# Altium PCB EE-1002657_FAB_IMUPlusMAGIslands.PcbDoc
Units mm, origin at the board's own origin, x right, y up, seen from the top; angles counter-clockwise.
Board outline 10.48 x 11.8 mm, 4 copper layers (L01-Top Layer, L02-Inner Layer, L03-Inner Layer, L04-Bottom Layer), stack 1.488 mm thick; 31 components, 21 nets, 114 pads, 57 vias.
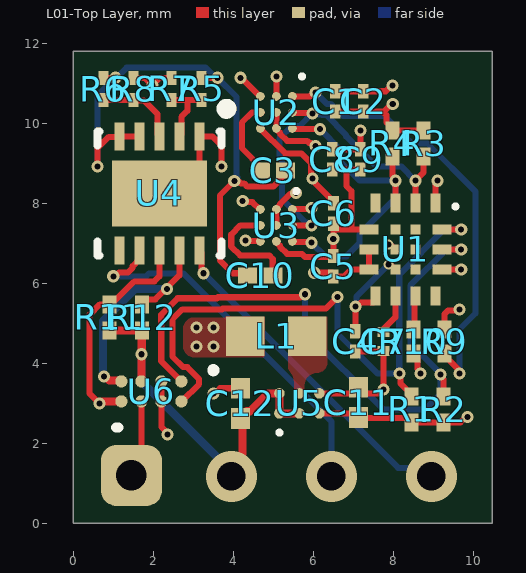
[diagram p0: L01-Top Layer view]
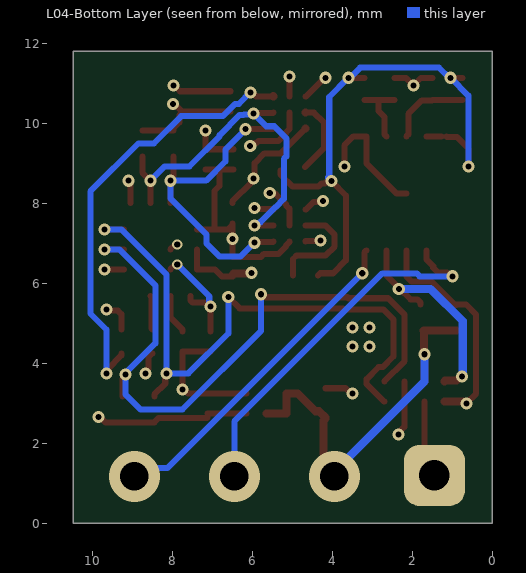
[diagram p1: L04-Bottom Layer view, seen from below]
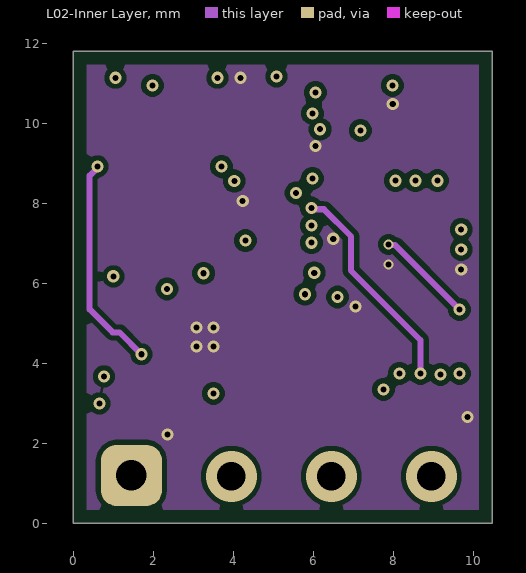
[diagram p2: L02-Inner Layer]
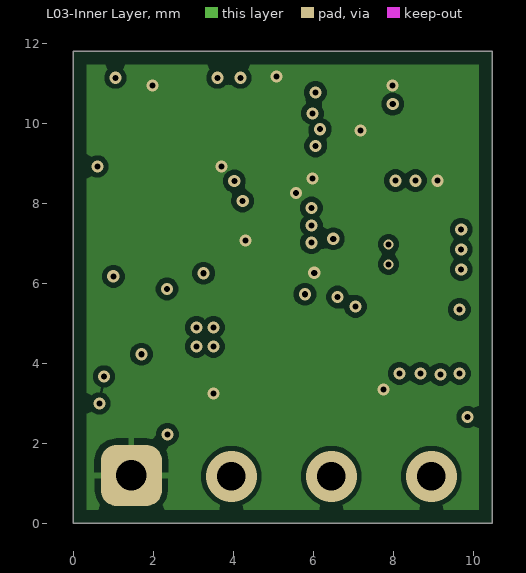
[diagram p3: L03-Inner Layer]
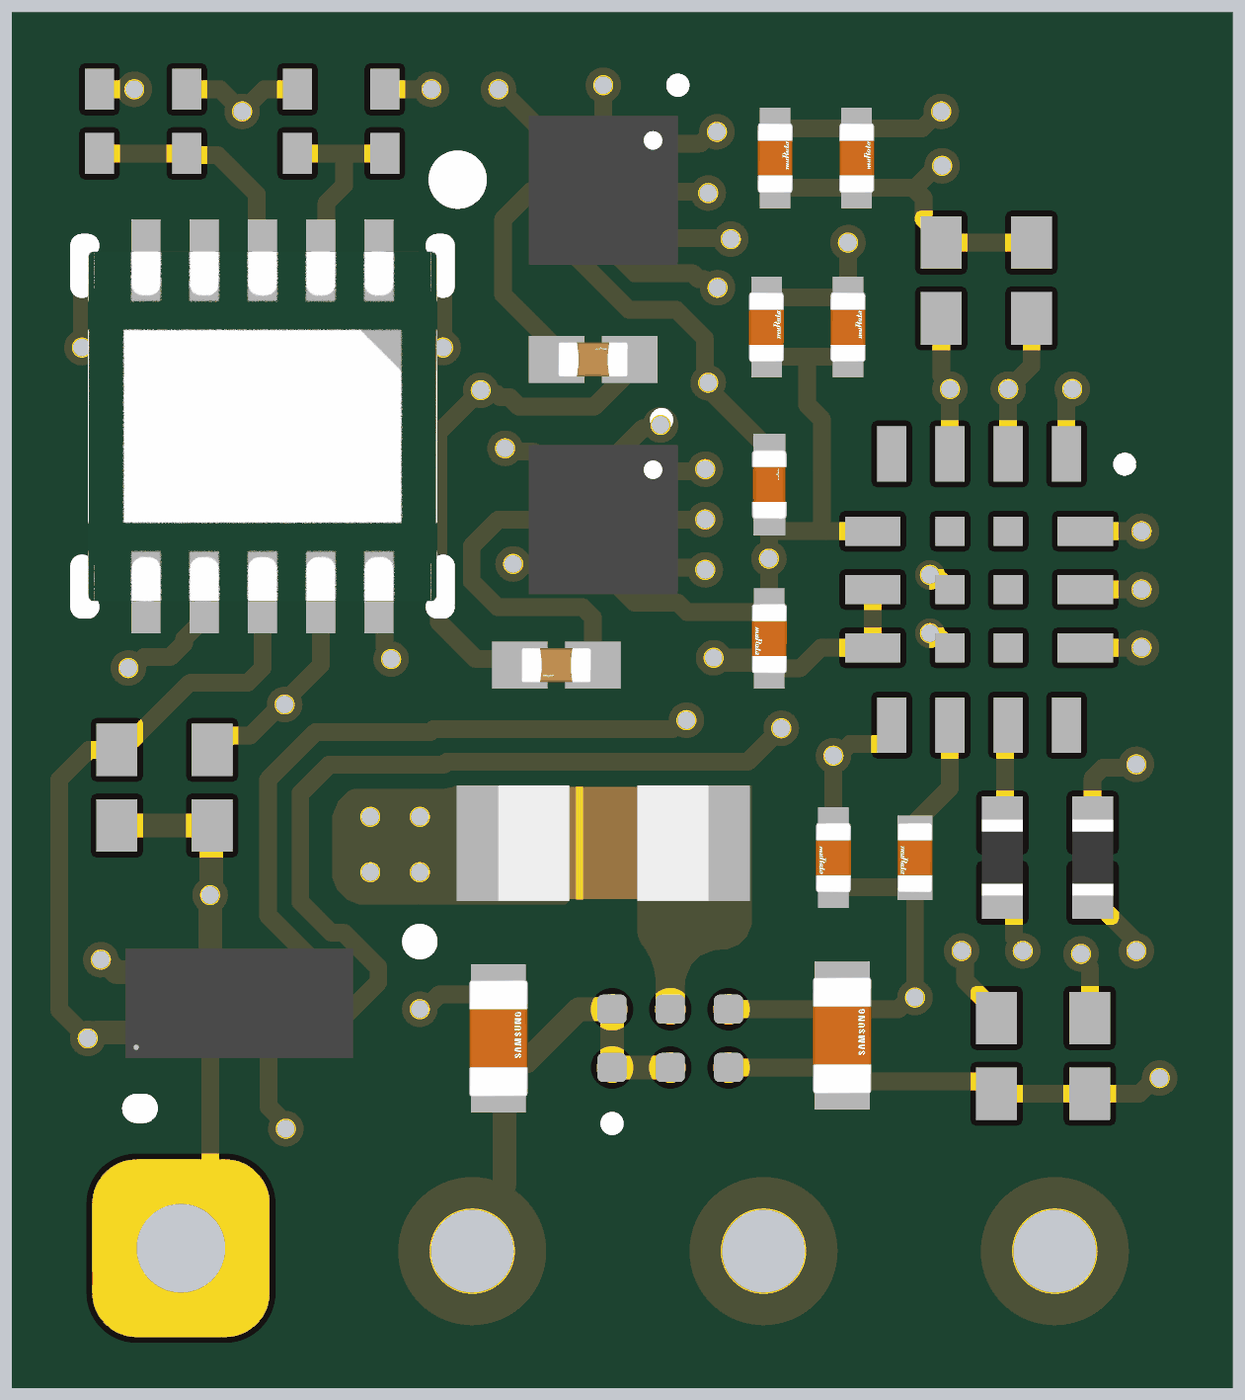
[diagram p4: 3D render of the assembled board from above, using the file's embedded part models]

## Layer stack, top to bottom
Top Solder: solder mask 0.0102, Solder Resist, Dk 3.5
L01-Top Layer: signal copper 0.0508
Dielectric 1: prepreg 0.0965, 2x106, Dk 4.2
L02-Inner Layer: signal copper 0.0178
Dielectric 2: core 1.1582, FR4, Dk 4.2
L03-Inner Layer: signal copper 0.0178
Dielectric 3: prepreg 0.0965, 2x106, Dk 4.2
L04-Bottom Layer: signal copper 0.0508
Bottom Solder: solder mask 0.0102, Solder Resist, Dk 3.5

## Board outline
0,0 10.475,0 10.475,11.8 0,11.8

## Design rules (kind name [scope] priority, off if disabled: settings)
AcuteAngle [All] p1: minimum=6.00000000000000E+0001 checktracksonly=FALSE
BoardOutlineClearance [All] p1: gap=0.33 ignorepadtopadclearanceinfootprint=FALSE
Clearance Clearance_L1andL4_Copper [(InPolygon AND (OnLayer('Top Layer') OR OnLayer('Bottom Layer'))) vs (InDifferentialPairClass('All Differential Pairs'))] p1: gap=0.2 ignorepadtopadclearanceinfootprint=FALSE except(0.3: Arc-Hole Track-Hole SMDPad-Hole THPad-Hole Via-Hole Fill-Hole Poly-Hole Region-Hole Text-Hole; 0.5: Arc-Fill Arc-Poly Arc-Region Track-Fill Track-Poly Track-Region SMDPad-Fill SMDPad-Poly SMDPad-Region THPad-Fill THPad-Poly THPad-Region Via-Fill Via-Poly Via-Region Fill-Fill Fill-Poly Fill-Region Poly-Poly Poly-Region Region-Region)
Clearance [All] p2: gap=0.127 ignorepadtopadclearanceinfootprint=FALSE
ComponentClearance [All] p1: gap=0.4 collisioncheckmode=3 verticalgap=0.5 showdistances=FALSE
DiffPairsRouting 90_Ohm_L1andL4 [InDifferentialPairClass('90_Ohm')] p1: maxlimit=0.254 minlimit=0.14 mostfreqgap=0.254 toplayer_maxgap=0.14 toplayer_prefgap=0.14 toplayer_minwidth=0.114 toplayer_maxwidth=0.114 toplayer_prefwidth=0.114 midlayer1_mingap=0.254 midlayer1_minwidth=0.381 midlayer1_maxwidth=0.381 midlayer1_prefwidth=0.381 midlayer2_mingap=0.254 midlayer2_minwidth=0.381 midlayer2_maxwidth=0.381 midlayer2_prefwidth=0.381 bottomlayer_maxgap=0.14 bottomlayer_prefgap=0.14 bottomlayer_minwidth=0.114 bottomlayer_maxwidth=0.114 bottomlayer_prefwidth=0.114 maxuncoupledlength=5.08
DiffPairsRouting 100_Ohm_L1andL4 [InDifferentialPairClass('100_Ohm')] p2: maxlimit=0.254 minlimit=0.241 mostfreqgap=0.254 toplayer_maxgap=0.241 toplayer_prefgap=0.241 toplayer_minwidth=0.114 toplayer_maxwidth=0.114 toplayer_prefwidth=0.114 midlayer1_mingap=0.254 midlayer1_minwidth=0.381 midlayer1_maxwidth=0.381 midlayer1_prefwidth=0.381 midlayer2_mingap=0.254 midlayer2_minwidth=0.381 midlayer2_maxwidth=0.381 midlayer2_prefwidth=0.381 bottomlayer_maxgap=0.241 bottomlayer_prefgap=0.241 bottomlayer_minwidth=0.114 bottomlayer_maxwidth=0.114 bottomlayer_prefwidth=0.114 maxuncoupledlength=5.08
DiffPairsRouting 100_Ohm_Default [All] p3: maxlimit=0.254 minlimit=0.241 mostfreqgap=0.254 toplayer_maxgap=0.241 toplayer_prefgap=0.241 toplayer_minwidth=0.114 toplayer_maxwidth=0.114 toplayer_prefwidth=0.114 midlayer1_mingap=0.254 midlayer1_minwidth=0.381 midlayer1_maxwidth=0.381 midlayer1_prefwidth=0.381 midlayer2_mingap=0.254 midlayer2_minwidth=0.381 midlayer2_maxwidth=0.381 midlayer2_prefwidth=0.381 bottomlayer_maxgap=0.241 bottomlayer_prefgap=0.241 bottomlayer_minwidth=0.114 bottomlayer_maxwidth=0.114 bottomlayer_prefwidth=0.114 maxuncoupledlength=5.08
HoleSize [All] p1: absolutevalues=TRUE maxlimit=3 minlimit=0.15 maxpercent=80.000 minpercent=20.000
MatchedLengths [InDifferentialPairClass('All Differential Pairs')] p1: tolerance=0.025 checknetsindiffpair=TRUE checkdiffpairvsdiffpair=FALSE checkxsignals=FALSE checkothers=FALSE
MinimumSolderMaskSliver [All] p1: minsoldermaskwidth=0.076 // 0.076mm for Green Soldermask, 0.1 for other color soldermask
PlaneClearance [All] p1: clearance=0.254
PlaneConnect [All] p1: planeconnectstyle=Direct reliefexpansion=0.508 reliefentries=4 reliefconductorwidth=0.254 reliefairgap=0.254
PolygonConnect [All] p1: thpad.connectstyle=Relief thpad.reliefconductorwidth=0.152 thpad.reliefentries=4 thpad.polygonreliefangle="90 Angle" thpad.airgapwidth=0.152 smdpad.connectstyle=Direct smdpad.reliefconductorwidth=0.152 smdpad.reliefentries=4 smdpad.polygonreliefangle="90 Angle" smdpad.airgapwidth=0.152 via.connectstyle=Direct via.reliefconductorwidth=0.254 via.reliefentries=4 via.polygonreliefangle="90 Angle" via.airgapwidth=0.254
PolygonConnect PolygonConnect_1 [All vs InNamedPolygon('1V8_L01_P002')] p2: connectstyle=Direct reliefconductorwidth=0.152 reliefentries=4 polygonreliefangle="90 Angle" airgapwidth=0.152
RoutingCorners [All] p1: cornerstyle=45-Degree minsetback=2.5 maxsetback=2.5
RoutingVias [All] p1: holewidth=0.203 width=0.406 viastyle="Through Hole" minholewidth=0.152 minwidth=0.254 maxholewidth=1.27 maxwidth=1.27
SilkToSilkClearance [All] p1: silktosilkclearance=0.1
SilkToSolderMaskClearance "SilkToSolderMaskClearance_Exposed Copper Pad or Via" [IsPad or IsVia] p1: minsilkscreentomaskgap=0.203 clearancetoexposedcopper=TRUE
SolderMaskExpansion [All] p1: expansion=0.05 istentingtop=FALSE
SupplyNets "Schematic Supply Nets_2" [InNet('1V8')] p1: voltage=0.000
SupplyNets "Schematic Supply Nets_1" [InNet('3V3')] p2: voltage=0.000
SupplyNets "Schematic Supply Nets" [InNet('GND')] p3: voltage=0.000
UnRoutedNet [All] p1: checkbadconnections=TRUE
Width Width_PWR [InNetClass('PWR')] p1: maxlimit=0.5 minlimit=0.2 preferedwidth=0.3 minimp=50.000000 maximp=50.000000 favimp=50.000000
Width Width_GND [InNetClass('GND')] p2: maxlimit=0.5 minlimit=0.2 preferedwidth=0.3 minimp=50.000000 maximp=50.000000 favimp=50.000000
Width Width_Defualt [All] p3: maxlimit=1 minlimit=0.1 preferedwidth=0.2 // This is the defualt width rule for anything that does not have a specific width rule.
20 further rules are at their usual default settings.

## Components (designator, comment, footprint, x,y, rotation, side; value= is the part's Value field where it differs from the comment)
C1 "0.1uF" FP-GRM033-0_03-IPC_C 6.55,10.55 r90 top
C2 "0.1uF" FP-GRM033-0_03-IPC_C 7.25,10.55 r90 top
C3 "2.2uF" FP-GRM033-0_09-IPC_B 4.987,8.823 r0 top
C4 "0.1uF" FP-GRM033-0_03-IPC_C 7.05,4.55 r270 top
C5 "0.1uF" FP-GRM033-0_03-IPC_C 6.5,6.429 r270 top
C6 "1uF" FP-GRM033-0_05-e01_0_2-IPC_C 6.5,7.75 r90 top
C7 "220nF" FP-GRM033-0_03-MFG 7.75,4.55 r270 top
C8 "0.1uF" FP-GRM033-0_03-IPC_C 6.475,9.1 r90 top
C9 "0.1uF" FP-GRM033-0_03-IPC_C 7.175,9.1 r90 top
C10 "2.2uF" FP-GRM033-0_09-IPC_B 4.671,6.201 r180 top
C11 "4.7uF" FP-CL828-IPC_C 7.125,3.025 r90 top
C12 "4.7uF" FP-CL828-IPC_C 4.175,3 r90 top
L1 "MCHK1608T1R0MKN" IND_MCHK1608T1R0MKN_TAY 5.075,4.675 r0 top
R1 "4.7K" RESC0603X26X15NL03T05 8.45,2.85 r270 top
R2 "4.7K" RESC0603X26X15NL03T05 9.25,2.85 r270 top
R3 "4.7K" RESC0603X26X15NL03T05 8.75,9.5 r90 top
R4 "4.7K" RESC0603X26X15NL03T05 7.975,9.5 r90 top
R5 "1000k" RESC0603X26X15LL03T05 3.2,10.865 r90 top
R6 "1000k" RESC0603X26X15LL03T05 0.75,10.865 r90 top
R7 "280k" RESC0603X26X15LL03T05 2.45,10.865 r270 top
R8 "392k OR" RESC0603X26X15LL03T05 1.5,10.865 r270 top
R9 "0 ohm" RESC0603X28X15NL5T05 9.275,4.55 r90 top
R10 "0 Ohm" RESC0603X28X15NL5T05 8.5,4.55 r90 top
R11 "4.7K" RESC0603X26X15NL03T05 0.9,5.15 r270 top
R12 "4.7K" RESC0603X26X15NL03T05 1.718,5.15 r270 top
U1 "BHI360" BHI360 8.3,6.85 r270 top locked
U2 "BMM350" BMM350 5.075,10.275 r270 top
U3 "BMM350" BMM350 5.075,7.45 r270 top
U4 "LTC4316" FP-DD-10-05-08-1699-MFG 2.15,8.25 r270 top
U5 "LM3691TL-1.8/NOPB" YZR0006APAF 5.65,3 r90 top
U6 "TCA9406YZPR" YZP8 1.95,3.3 r270 top

## Footprints (in the part's own frame and the unit in brackets; to place one, negate y for a bottom-side part, rotate by r counter-clockwise, add the part's x,y. Pads: shape width x height; smd on the part's side, far side on the other; paste and mask are expansions set on the pad)
BHI360 [mm]
  rect 0.475x0.25 smd: 1(-1.163,0.75) 2(-1.163,0.25) 3(-1.163,-0.25) 4(-1.163,-0.75) 8(1.163,-0.75) 9(1.163,-0.25) 10(1.163,0.25) 11(1.163,0.75)
  rect 0.25x0.475 smd: 5(-0.5,-0.913) 6(0,-0.913) 7(0.5,-0.913) 12(0.5,0.912) 13(0,0.912) 14(-0.5,0.912)
  rect 0.25x0.25 smd: 15(-0.5,-0.25) 16(0,-0.25) 17(0.5,-0.25) 18(0.5,0.25) 19(0,0.25) 20(-0.5,0.25)
  silkscreen extent -1.13,1.2 -1.03,1.3
BMM350 [mm] "BGA, 9-Leads, Body 1.28x1.28mmx0.50mm, Pitch 0.40mm"
  round 0.22 smd: A1(-0.4,0.4) A2(0,0.4) A3(0.4,0.4) B1(-0.4,0) B2(0,0) B3(0.4,0) C1(-0.4,-0.4) C2(0,-0.4) C3(0.4,-0.4)
  silkscreen extent -0.95,0.59 -0.85,0.69, body extent -0.64,-0.64 0.64,0.64, height 0.5
FP-CL828-IPC_C [mm]
  rect 0.515x0.472 smd paste+0 mask+0: 1(-0.379,0) 2(0.379,0)
  body extent -0.74,-0.38 0.74,0.38, height 0.25
FP-DD-10-05-08-1699-MFG [mm]
  rect 0.7x0.25 smd paste+0 mask+0: 1(-1.425,1) 2(-1.425,0.5) 3(-1.425,0) 4(-1.425,-0.5) 5(-1.425,-1) 6(1.425,-1) 7(1.425,-0.5) 8(1.425,0) 9(1.425,0.5) 10(1.425,1)
  rect 1.65x2.38 smd paste+0 mask+0: 11(0,0)
  silkscreen extent -2.24,-1.55 1.55,1.8, body extent -1.88,-1.65 1.88,1.65, height 0.25
FP-GRM033-0_03-IPC_C [mm]
  rect 0.354x0.263 smd paste+0 mask+0: 1(-0.254,0) 2(0.254,0)
  body extent -0.53,-0.27 0.53,0.27, height 0.25
FP-GRM033-0_03-MFG [mm]
  rect 0.25x0.3 smd paste+0 mask+0: 1(-0.238,0) 2(0.238,0)
  body extent -0.46,-0.27 0.46,0.27, height 0.25
FP-GRM033-0_05-e01_0_2-IPC_C [mm]
  rect 0.361x0.272 smd paste+0 mask+0: 1(-0.256,0) 2(0.256,0)
  body extent -0.54,-0.28 0.54,0.28, height 0.25
FP-GRM033-0_09-IPC_B [mm]
  rect 0.477x0.403 smd paste+0 mask+0: 1(-0.313,0) 2(0.313,0)
  body extent -0.7,-0.35 0.7,0.35, height 0.25
IND_MCHK1608T1R0MKN_TAY [mil]
  rect 38x39 smd paste+0 mask+0: 1(-30.5,0) 2(30.5,0)
  silkscreen extent -65,-36 -59,-30, body extent -36,-19 36,19, height 32
RESC0603X26X15LL03T05 [mm] "Chip Resistor, 2-Leads, Body 0.60x0.30mm, IPC High Density"
  rect 0.35x0.25 smd: 1(-0.275,0) 2(0.275,0)
  body extent -0.32,-0.16 0.31,0.17, height 0.26
RESC0603X26X15NL03T05 [mm] "Chip Resistor, 2-Leads, Body 0.60x0.30mm, IPC Medium Density"
  rect 0.45x0.35 smd: 1(-0.325,0) 2(0.325,0)
  body extent -0.32,-0.16 0.32,0.17, height 0.26
RESC0603X28X15NL5T05 [mm] "Chip Resistor, 2-Leads, Body 0.65x0.35mm, IPC Medium Density"
  rect 0.45x0.35 smd: 1(-0.3,0) 2(0.3,0)
  body extent -0.33,-0.18 0.33,0.18, height 0.28
YZP8 [mm]
  round 0.305 smd: A1(0.25,-0.75) A2(-0.25,-0.75) B1(0.25,-0.25) B2(-0.25,-0.25) C1(0.25,0.25) C2(-0.25,0.25) D1(0.25,0.75) D2(-0.25,0.75)
  body extent -0.47,-0.98 0.47,0.98, height 0.51
YZR0006APAF [mm] "Micro SMD, 6-Leads, Body 1.57x1.26mm, Pitch 0.5mm, NSC Recommended"
  round 0.265 smd paste-0.132 mask+0.05: A1(-0.25,0.5) A2(0.25,0.5) B1(-0.25,0) B2(0.25,0) C1(-0.25,-0.5) C2(0.25,-0.5)
  silkscreen extent -0.78,0.45 -0.68,0.55, body extent -0.63,-0.78 0.63,0.79, height 0.68

## Part data
C1 C2 C4 C5 C8 C9: library part CMP-2010-01264-2, "Chip Multilayer Ceramic Capacitors for General Purpose, 0201, 0.10uF, X5R, 15%, 10%, 10V", Capacitance=100nF, Case Code (Imperial)=0201, Case Code (Metric)=0603, Dielectric=X5R, Max Operating Temperature=85°C, Min Operating Temperature=-55°C, Package Quantity=1, Tolerance=10%, Voltage=10V, Case/Package=0201, Depth=0.3mm, Height=0.3mm, Lead Free="Lead Free", Length=0.6mm, Mount="Surface Mount", Packaging="Tape and Reel", Radiation Hardening=No, REACH SVHC="No SVHC", Termination=SMD/SMT, Thickness=0.013inch, Voltage Rating=10V, Voltage Rating (DC)=10V, Weight=6E-06oz, Width=0.012inch
C3 C10: library part CMP-06035-032992-1, "Chip Multilayer Ceramic Capacitors for General Purpose, 0201, 2.2uF, X5R, 15%, 10%, 10V", Case Code (Imperial)=0201, Case Code (Metric)=0603, Dielectric=X5R, Max Operating Temperature=85°C, Min Operating Temperature=-55°C, Tolerance=10%, Voltage Rating=10V, Capacitance=2.2uF, Case/Package=0201, Length=0.024inch, Mount="Surface Mount", Packaging="Tape and Reel", Thickness=0.015inch, Voltage Rating (DC)=10V, Width=0.012inch
C6: library part CMP-06035-049957-1, "Chip Multilayer Ceramic Capacitors for General Purpose, 0201, 1.0uF, X5R, 15%, 20%, 4V", Case Code (Imperial)=0201, Case Code (Metric)=0603, Dielectric=X5R, Max Operating Temperature=85°C, Min Operating Temperature=-55°C, Package Quantity=15000, Tolerance=20%, Voltage Rating=4V, Capacitance=1uF, Case/Package=0201, Height=0.3mm, Length=0.024inch, Mount="Surface Mount", Packaging="Tape and Reel", Termination=SMD/SMT, Thickness=0.014inch, Voltage Rating (DC)=4V, Weight=1.2E-05oz, Width=0.012inch
C7: library part CMP-06035-052827-1, "Chip Multilayer Ceramic Capacitors for General Purpose, 0201, 0.22uF, X6S, 22%, 10%, 6.3V", Case Code (Imperial)=0201, Case Code (Metric)=0603, Dielectric=X6S, Max Operating Temperature=105°C, Min Operating Temperature=-55°C, Package Quantity=15000, Tolerance=10%, Voltage Rating=6.3V, Capacitance=220nF, Case/Package=0201, Height=0.3mm, Length=0.024inch, Mount="Surface Mount", Packaging="Tape and Reel", Termination=SMD/SMT, Thickness=0.013inch, Voltage Rating (DC)=6.3V, Weight=1.2E-05oz, Width=0.012inch
C11 C12: library part CMP-13271-001251-1, "Cap Ceramic 4.7uF 10V X5R ±10% SMD 0402 +85°C Paper T/R", Case Code (Imperial)=0402, Case Code (Metric)=1005, Dielectric=X5R, Max Operating Temperature=85°C, Min Operating Temperature=-55°C, Package Quantity=1, Tolerance=10%, Voltage Rating=10V, Capacitance=4.7uF, Case/Package=0402, Depth=0.5mm, Height=0.5mm, Lead Free="Lead Free", Length=1mm, Material=Ceramic, Mount="Surface Mount", Packaging="Tape and Reel", Radiation Hardening=No, Thickness=0.022inch, Width=0.02inch
L1: "No Description Available", Mfr_Name="Taiyo Yuden", Copyright="Copyright (C) 2024 Ultra Librarian. All rights reserved.", Manufacturer_Part_Number=MCHK1608T1R0MKN, RefDes=RefDes, Type=DEV
R1 R2 R3 R4 R11 R12: library part CMP-2004-02966-1, Manufacturer=Panasonic, Part Number=ERJ-1GEF4701C
R5 R6: library part CMP-2004-03447-1, Manufacturer=Panasonic, Part Number=ERJ1GNF1004C
R7: library part CMP-2004-03303-1, Manufacturer=Panasonic, Part Number=ERJ-1GNF2803C
R8: library part CMP-2004-02924-1, Manufacturer=Panasonic, Part Number=ERJ-1GEF3923C
R9 R10: library part CMP-2004-00001-2, "Chip Resistor, 0 Ohm, Jumper, 0.05 W, -55 to 155 degC, 0201 (0603 Metric), RoHS, Tape and Reel", Case Code (Imperial)=0201, Case Code (Metric)=0603, Max Operating Temperature="155 degC", Min Operating Temperature="-55 degC", Package Quantity=1, Power Rating="50 mW", Resistance="0 mohm", Tolerance=5%, Voltage Rating="30 V", Case\Package=0201, ComponentLink1Description="Manufacturer URL", ComponentLink1URL=http://www.vishay.com/, ComponentLink2Description=Datasheet, ComponentLink2URL=http://www.vishay.com/docs/20052/crcw0201e3.pdf, DatasheetVersion=03/2016, Height="0.23 mm", Length="0.6 mm", Mount="Surface Mount", Mounting Technology="Surface Mount", PackageDescription="2-Pin Surface Mount Device, Body 0.6 x 0.3 mm", PackageReference=0201, Packaging="Cut Tape", Radiation Hardening=No, REACH SVHC=Unknown, RoHSCompliant=true, Weight="6E-06 oz", Width="0.3 mm"
U1: "IMUs - Inertial Measurement Units Programmable smart sensor combining accelerometer, gyroscope and fusion software", Manufacturer_Name=BOSCH, Mouser Part Number=262-BHI360, Datasheet Link=https://www.bosch-sensortec.com/media/boschsensortec/downloads/datasheets/bst-bhi360-ds000.pdf, Geometry.Height=1mm, Manufacturer_Part_Number=BHI360, Mouser Price/Stock=https://www.mouser.co.uk/ProductDetail/Bosch-Sensortec/BHI360?qs=ulEaXIWI0c93cz3Dqv%252BGgg%3D%3D
U4: library part CMP-00026-88946113-1, "LTC4316IDD#TRPBF Interface - Specialized 1x I2C/SMBus Address Translator", Case/Package=DFN, Manufacturer Lifecycle Status=PRODUCTION, Interface=I2C, Lifecycle Status=Production, Mount="Surface Mount", NexarPartId=88946113, Number of Pins=10, RoHS=Compliant
U5: library part CMP-0063-00271-3, "High Accuracy, Miniature 1A, Step-Down DC-DC Converter for Portable Applications, 6-pin Micro SMD, Pb-Free", Manufacturer="Texas Instruments", PackageTopMarking="XV*I Z", PowerWise=Y, Code_JEDEC=MO-211-DB, ComponentLink1Description="Datasheet URL", ComponentLink1URL=http://www.ti.com/general/docs/lit/getliterature.tsp?genericPartNumber=LM3691&fileType=pdf, CompType=MiscPower, High-Reliability=Y, PackageDescription="Thin Micro SMD, 6 Bump (Large), 0.5mm Pitch", PackageReference=YZR0006APAF, PartNumber=LM3691TL-1.8/NOPB, PinCount=6, RoHS=Y
U6: "No Description Available", Mfr_Name="Texas Instruments", Copyright="Copyright (C) 2024 Ultra Librarian. All rights reserved.", Manufacturer_Part_Number=TCA9406YZPR, RefDes=RefDes, Type=DEV

## Free pads (board coordinates)
  rrect50% 1.524x1.524 hole 0.762 mask+0.05: 1(1.45,1.2)

## Via types
v1: diameter 0.305, hole 0.152, L01-Top Layer to L04-Bottom Layer, tented bottom, 52 vias
v2: diameter 1.27, hole 0.711, L01-Top Layer to L04-Bottom Layer, tented bottom, 3 vias
v3: diameter 0.254, hole 0.152, L01-Top Layer to L04-Bottom Layer, tented both sides, 2 vias

## Nets (pads, with @x,y where several pads share a name; then routed paths per layer and width w, separated by ;. In a path a pad name is that pad's centre, name@x,y a point inside that pad or via, vN(x,y) a via of type N, cw(c..) or ccw(c..) an arc to the next point about the centre after c; other vN are vias at no path point)
1V8: C1.1 C2.1 C4.1 C5.1 C6.1 C8.1 C9.1 C11.1 L1.1 R1.2 R2.2 R3.2 R4.2 U1.5 U1.8 U1.12 U1.17 U2.B2 U2.B3 U2.C1 U3.B3 U3.C1 U5.C1 U6.C1 U6.C2 | length 19.9
  L01-Top Layer w0.152: U6.C2 2.2,2.416 2.35,2.266 v1(2.35,2.225) ; v1@4.192,11.14 4.657,10.675 U2.C1 ; v1(4.232,8.061) 4.261,8.031 4.475,8.031 4.657,7.85 U3.C1 ; U3.B3 5.075,7.032 5.162,6.945 5.162,6.92 5.345,6.737 5.712,6.737 5.792,6.657 6.5,6.657 C5.1 C6.1@6.5,7.45 ; U2.B2 5.075,9.857 5.162,9.77 5.162,9.745 5.345,9.562 5.842,9.562 5.893,9.51 5.942,9.51 6.014,9.438 v1(6.055,9.438) ; U5.C1 C11.1@7.125,2.75 ; C8.1 6.825,8.846 ; C6.1 C6.1@6.5,7.45 ; C1.1 C2.1 7.735,10.296 ; C4.1 v1(7.05,5.424) 7.091,5.424 7.193,5.526 7.501,5.526 7.55,5.574 U1.8 ; C11.1 7.141,2.631 8.351,2.631 8.45,2.532 R1.2 R2.2 9.674,2.525 9.809,2.66 v1(9.85,2.66) ; C9.1 6.825,8.846 ; U1.5 6.95,7.35 ; v3(7.878,6.475) 7.898,6.456 7.944,6.456 U1.17 ; v1(7.983,10.484) 7.942,10.484 7.754,10.296 7.735,10.296 ; R3.2 R4.2 7.975,9.875 7.825,10.025 7.825,10.206 7.735,10.296 ; U1.12 v1(9.694,6.35) ; C6.1@6.5,7.45 6.6,7.35 6.95,7.35 ; 6.825,8.846 6.825,8.435 6.95,8.31 6.95,7.35
  L04-Bottom Layer w0.152: v1(7.05,5.424) 7.079,5.453 7.079,5.676 v3(7.878,6.475)
  other v1: 3.075,4.425 3.5,4.425 3.075,4.9 3.5,4.9 6.496,7.114 4.175,11.14
3V3: C3.2 C10.2 C12.1 R5.2 R6.2 R11.2 R12.2 U4.4 U4.5 U5.A1 U5.A2 U5.B1 U6.B2 | length 30
  L01-Top Layer w0.152: v1(0.6,8.925) 0.6,9.375 0.886,9.661 1.136,9.661 U4.5 ; R6.2 v1(1.05,11.14) ; U4.5@1.273,9.675 U4.4 ; R5.2 v1(3.6,11.14) ; v1@4.016,8.559 4.016,8.552 3.661,8.198 3.661,6.574 3.981,6.254 4.304,6.254 C10.2 ; v1(4.023,8.559) 4.052,8.53 4.159,8.53 4.188,8.5 4.27,8.5 4.352,8.418 4.996,8.418 5.301,8.723 C3.2
  L01-Top Layer w0.203: R11.2 R12.2 1.709,4.816 1.709,4.238 v1(1.7,4.229) U6.B2 ; v2(3.95,1.175) 3.95,1.464 4.225,1.739 4.225,2.571 C12.1 4.175,2.643 4.335,2.803 4.418,2.803 4.865,3.25 U5.A2 U5.A1 U5.B1
  L02-Inner Layer w0.152: v1(0.6,8.925) 0.6,8.884 0.406,8.69 0.406,5.351 0.981,4.777 1.152,4.777 v1(1.7,4.229)
  L04-Bottom Layer w0.152: v1(0.6,8.925) 0.6,10.694 1.046,11.14 v1(1.05,11.14) 1.081,11.14 1.335,11.394 3.305,11.394 3.559,11.14 v1(3.6,11.14) 4.079,10.661 v1@4.079,8.644
  L04-Bottom Layer w0.2: v1(4.023,8.559) 4.023,8.587 v1@4.079,8.644
  L04-Bottom Layer w0.203: v1(1.7,4.229) 1.7,3.55 3.95,1.3 v2(3.95,1.175)
ASCX: R4.1 U1.3 U2.A3 U3.A3 | length 8.4
  L01-Top Layer w0.152: U3.A3 5.488,7.037 5.931,7.037 v1(5.95,7.018) ; U2.A3 5.485,9.865 6.159,9.865 v1(6.169,9.855) ; R4.1 7.975,8.685 8.05,8.61 v1(8.05,8.569) U1.3
  L04-Bottom Layer w0.152: v1(5.95,7.018) 6.293,6.675 6.825,6.675 7.15,7 7.15,7.225 8.05,8.125 v1(8.05,8.569) 7.156,8.569 6.677,9.048 6.677,9.347 v1(6.169,9.855)
ASDX: R3.1 U1.2 U2.A2 U3.A2 | length 9.2
  L01-Top Layer w0.152: U3.A2 v1(5.95,7.45) ; U2.A2 5.487,10.263 5.962,10.263 v1(5.975,10.25) ; U1.2 v1(8.55,8.569) 8.75,8.769 R3.1
  L04-Bottom Layer w0.152: v1(5.95,7.45) 5.909,7.45 5.833,7.526 5.803,7.526 5.423,7.906 5.419,7.906 5.211,8.114 5.211,9.114 5.15,9.175 5.15,9.624 5.454,9.928 5.653,9.928 v1(5.975,10.25) 6.004,10.221 6.209,10.221 6.219,10.211 6.316,10.211 6.819,9.707 6.819,9.678 7.572,8.925 8.197,8.925 8.55,8.572 v1(8.55,8.569)
GND: C1.2 C2.2 C4.2 C5.2 C6.2 C7.2 C8.2 C9.2 C11.2 C12.2 pad.1 R7.1 R8.1 U1.1 U1.6 U1.7 U2.B1 U2.C3 U3.B1 U3.B2 U3.C3 U4.1 U4.11 U5.C2 U6.B1 | length 20
  L01-Top Layer w0.152: R8.1 1.785,11.14 v1(1.975,10.95) 2.165,11.14 R7.1 ; pad.1@1.7,1.35 U6.B1 ; U4.11 2.401,8.25 3.15,8.999 U4.1 3.475,9.675 3.7,9.45 v1(3.7,8.925) ; v1(3.5,3.25) 3.541,3.25 3.67,3.379 C12.2 ; v1(4.301,7.069) 4.31,7.06 4.665,7.06 U3.C3 ; U2.C3@4.675,9.87 5.295,9.25 5.7,9.25 5.946,9.004 5.946,8.652 v1(5.975,8.623) 6.004,8.594 6.004,8.546 6.5,8.05 C6.2 ; U3.B2 5.075,7.868 5.162,7.955 5.162,7.98 5.414,8.232 5.537,8.232 v1(5.566,8.261) ; U2.B1 v1(5.075,11.175) ; U5.C2 7.609,3.25 7.709,3.35 v1(7.75,3.35) 7.75,4.296 C4.2 ; C8.2 C9.2 v1(7.175,9.825) ; C5.2 6.765,6.175 6.94,6.35 U1.7 U1.6 ; C1.2 C2.2 7.81,10.804 7.955,10.95 v1(7.975,10.95) ; U1.1 9.05,8.477 9.1,8.527 v1(9.1,8.569)
  L01-Top Layer w0.2: U2.C3@4.675,9.87 U2.C3 ; v1(6.021,6.264) 6.041,6.244 6.469,6.244 6.5,6.213 C5.2@6.5,6.195
JTAG_DIO: R9.2 U1.16 | length 3.5
  L01-Top Layer w0.152: v3(7.878,6.975) 7.898,6.956 7.944,6.956 U1.16 ; R9.2 9.275,5.233 9.363,5.321 9.621,5.321 v1(9.65,5.35)
  L02-Inner Layer w0.152: v3(7.878,6.975) 7.898,6.956 8.044,6.956 v1(9.65,5.35)
  L04-Bottom Layer w0.152: v1@9.621,5.379 v1(9.65,5.35)
NetC3_1: C3.1 U2.C2 | length 1.9
  L01-Top Layer w0.152: U2.C2@4.672,10.272 4.462,10.272 4.215,10.025 4.215,9.381 C3.1@4.687,8.909
  L01-Top Layer w0.203: U2.C2@4.672,10.272 U2.C2
NetC7_1: C7.1 U1.9 | length 1
  L01-Top Layer w0.152: C7.1@7.75,4.804 7.75,4.85 8.05,5.15 U1.9
NetC10_1: C10.1 U3.C2 | length 2.7
  L01-Top Layer w0.152: U3.C2 4.175,7.45 3.945,7.22 3.945,6.922 4.168,6.699 4.895,6.699 4.985,6.61 C10.1
NetL1_2: L1.2 U5.B2
NetR9_1: R9.1 U2.A1 | length 11
  L01-Top Layer w0.152: U2.A1@5.478,10.678 5.481,10.675 5.909,10.675 6.009,10.775 v1(6.05,10.775) ; R9.1 9.275,4.2 9.621,3.854 9.621,3.779 v1(9.65,3.75)
  L01-Top Layer w0.203: U2.A1 U2.A1@5.478,10.678
  L04-Bottom Layer w0.152: v1(6.05,10.775) 6.335,10.49 6.432,10.49 6.741,10.181 7.783,10.181 8.466,9.498 8.852,9.498 10.05,8.3 10.05,5.247 9.65,4.847 v1(9.65,3.75)
NetR10_1: R10.1 U3.A1 | length 6.5
  L01-Top Layer w0.152: U3.A1 5.488,7.863 5.931,7.863 v1(5.95,7.882) ; R10.1 8.599,4.151 8.599,3.867 8.675,3.791 v1(8.675,3.75)
  L02-Inner Layer w0.152: v1(5.95,7.882) 5.979,7.853 6.261,7.853 6.94,7.174 6.94,6.32 8.675,4.585 v1(8.675,3.75)
OCSB: R10.2 U1.10 | length 0.9
  L01-Top Layer w0.152: R10.2 8.525,4.875 8.525,5.662 U1.10
SCL_ADD_SHIFT_1V8: R2.1 U1.13 U6.D2 | length 16.5
  L01-Top Layer w0.152: U6.D2 2.7,3.553 2.196,4.057 2.196,5.216 2.607,5.628 3.593,5.628 3.618,5.653 5.671,5.653 5.747,5.729 v1(5.788,5.729) ; U1.13 v1(9.694,6.85) ; R2.1 v1@9.25,3.609
  L04-Bottom Layer w0.152: v1(5.788,5.729) 5.788,4.809 7.747,2.85 8.8,2.85 9.175,3.225 v1(9.175,3.725) 9.175,3.753 8.426,4.502 8.426,5.95 9.319,6.843 9.688,6.843 v1(9.694,6.85)
SCL_ADD_SHIFT_3V3: R12.1 U4.9 U6.A2 | length 5.6
  L01-Top Layer w0.152: R12.1@1.8,5.475 1.8,5.525 1.873,5.598 2.047,5.598 2.312,5.863 v1(2.34,5.863) ; v1@2.327,5.877 2.65,6.2 U4.9
  L01-Top Layer w0.203: v1(0.762,3.675) 0.789,3.675 0.895,3.569 1.181,3.569 U6.A2
  L04-Bottom Layer w0.203: v1(0.762,3.675) 0.743,3.694 0.743,5.059 1.547,5.863 v1(2.34,5.863)
SCL_GLOVE_3V3: U4.10 | length 8.4
  L01-Top Layer w0.152: U4.10 3.199,6.776 3.199,6.349 3.253,6.295 v1(3.253,6.253)
  L04-Bottom Layer w0.152: v1(3.253,6.253) 8.118,1.389 8.736,1.389 v2(8.95,1.175)
SDA_ADD_SHIFT_1V8: R1.1 U1.14 U6.D1 | length 15.5
  L01-Top Layer w0.152: U6.D1 2.712,3.05 3.144,3.482 3.144,3.608 2.847,3.906 2.742,3.906 2.475,4.173 2.475,5.101 2.723,5.349 3.709,5.349 3.734,5.373 6.316,5.373 6.586,5.643 v1@6.586,5.676 ; v1(8.15,3.75) 8.179,3.721 8.179,3.496 8.45,3.225 R1.1 ; U1.14 v1(9.694,7.35)
  L04-Bottom Layer w0.152: v1(6.602,5.66) 6.602,4.748 7.6,3.75 v1(8.15,3.75) 8.146,3.754 8.146,6.221 9.275,7.35 v1(9.694,7.35)
SDA_ADD_SHIFT_3V3: R11.1 U4.8 U6.A1 | length 5.8
  L01-Top Layer w0.152: v1(0.65,3) 0.406,3.244 0.406,5.221 0.66,5.475 R11.1 R11.1@0.95,5.475 ; R11.1@0.9,5.465 0.94,5.465 R11.1@0.95,5.475 ; R11.1@1,5.475 R11.1@0.95,5.475 ; 1.513,6.038 R11.1@0.95,5.475 ; 1.533,6.05 2.024,6.05 2.15,6.176 U4.8
  L01-Top Layer w0.203: v1(0.65,3) 0.677,3 0.727,3.05 U6.A1
SDA_GLOVE_3V3: U4.7 | length 9.6
  L01-Top Layer w0.152: v1(0.999,6.176) 1.04,6.176 1.135,6.272 1.359,6.272 1.478,6.391 1.478,6.428 1.65,6.6 U4.7
  L04-Bottom Layer w0.152: v1(0.999,6.176) v1(0.999,6.176) 1.817,6.175 1.89,6.248 2.752,6.248 6.45,2.55 v2(6.45,1.175) v2@6.45,1.075
XORH: R5.1 R7.2 U4.2 | length 1.8
  L01-Top Layer w0.152: R7.2 2.825,10.59 ; U4.2 2.699,9.724 2.699,10.164 2.85,10.315 2.85,10.565 2.825,10.59 ; R5.1 2.825,10.59
XORL: R6.1 R8.2 U4.3 | length 2.1
  L01-Top Layer w0.152: R6.1 R8.2 1.514,10.576 1.764,10.576 2.101,10.239 2.101,9.724 U4.3
pads on no net: U1.4 U1.11 U1.15 U1.18 U1.19 U1.20 U4.6

## Polygon pours and split planes (outlines as drawn)
1V8 on L01-Top Layer "1V8_L01_P002" (solid, pour order 2): 3.07,5.17 4.783,5.17 4.783,4.18 4.753,4.15 3.028,4.15 cw(c3.028,4.428) 2.75,4.428 2.75,4.85 cw(c3.07,4.85)
NetL1_2 on L01-Top Layer "NETL1_2_L01_P003" (solid, pour order 3): 6.35,5.17 5.367,5.17 5.367,3.926 ccw(c5.568,3.926) 5.41,3.802 cw(c4.986,3.469) 5.525,3.469 5.525,3.175 ccw(c5.575,3.175) 5.575,3.125 5.725,3.125 ccw(c5.725,3.175) 5.775,3.175 5.775,3.455 cw(c6.081,3.455) 6.081,3.761 ccw(c6.081,4.03) 6.35,4.03
GND on L03-Inner Layer "GND_L03_P001" (solid, pour order 1): 0,11.8 10.475,11.8 10.475,0 0,0
1V8 on L02-Inner Layer "1V8_L02_P000" (solid, pour order 0): 0,11.8 10.475,11.8 10.475,0 0,0

## Silkscreen, mask and mechanical layers (free items; w line width, h text height)
Top Overlay:
  lines w0.254: 1.072,2.4 1.125,2.4
M01_PCB_Outline:
  lines w0.254: 0,0.587 ccw(c0.587,0.587) 0.587,0 9.888,0 ccw(c9.888,0.612) 10.5,0.612 10.5,11.25 ccw(c9.95,11.25) 9.95,11.8 0.6,11.8 ccw(c0.6,11.2) 0,11.2 0,0.587